# Altium PCB DEV_BOARD.PcbDoc
Units mm, origin at the board's own origin, x right, y up, seen from the top; angles counter-clockwise.
Board outline 50 x 25 mm, 2 copper layers (Top Layer, Bottom Layer); 28 components, 28 nets, 151 pads, 19 vias.
Unrouted connection lines stored in the file: 16.
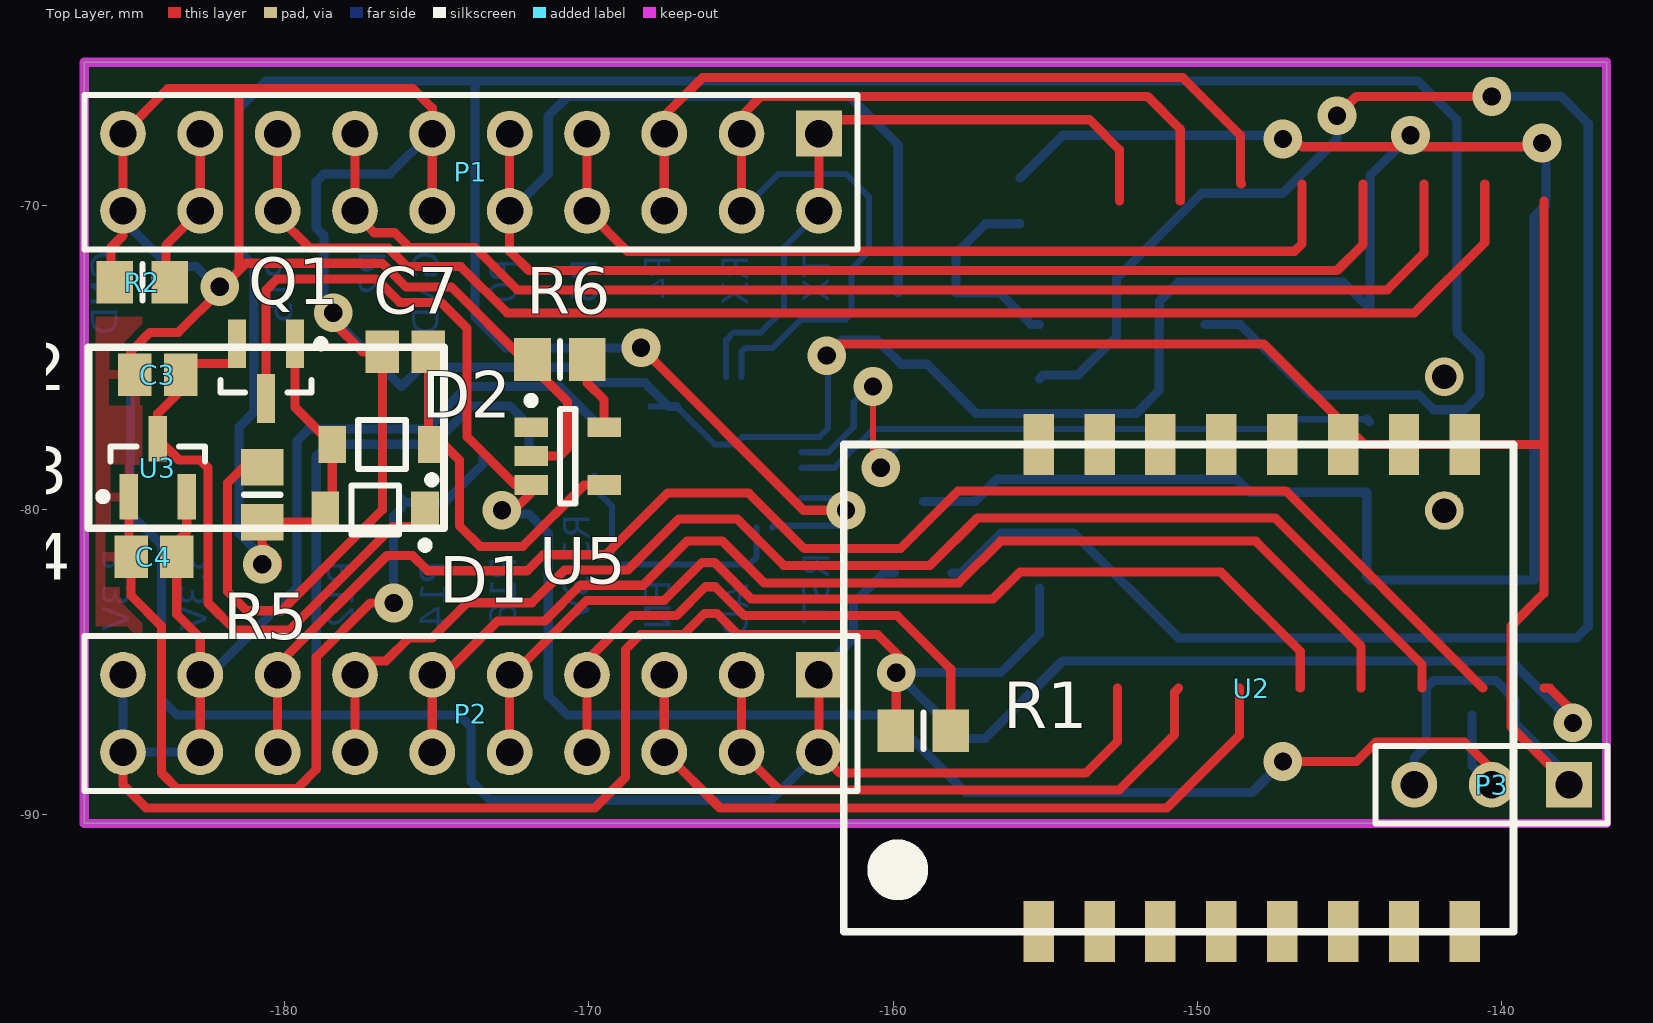
[diagram p0: Top Layer view]
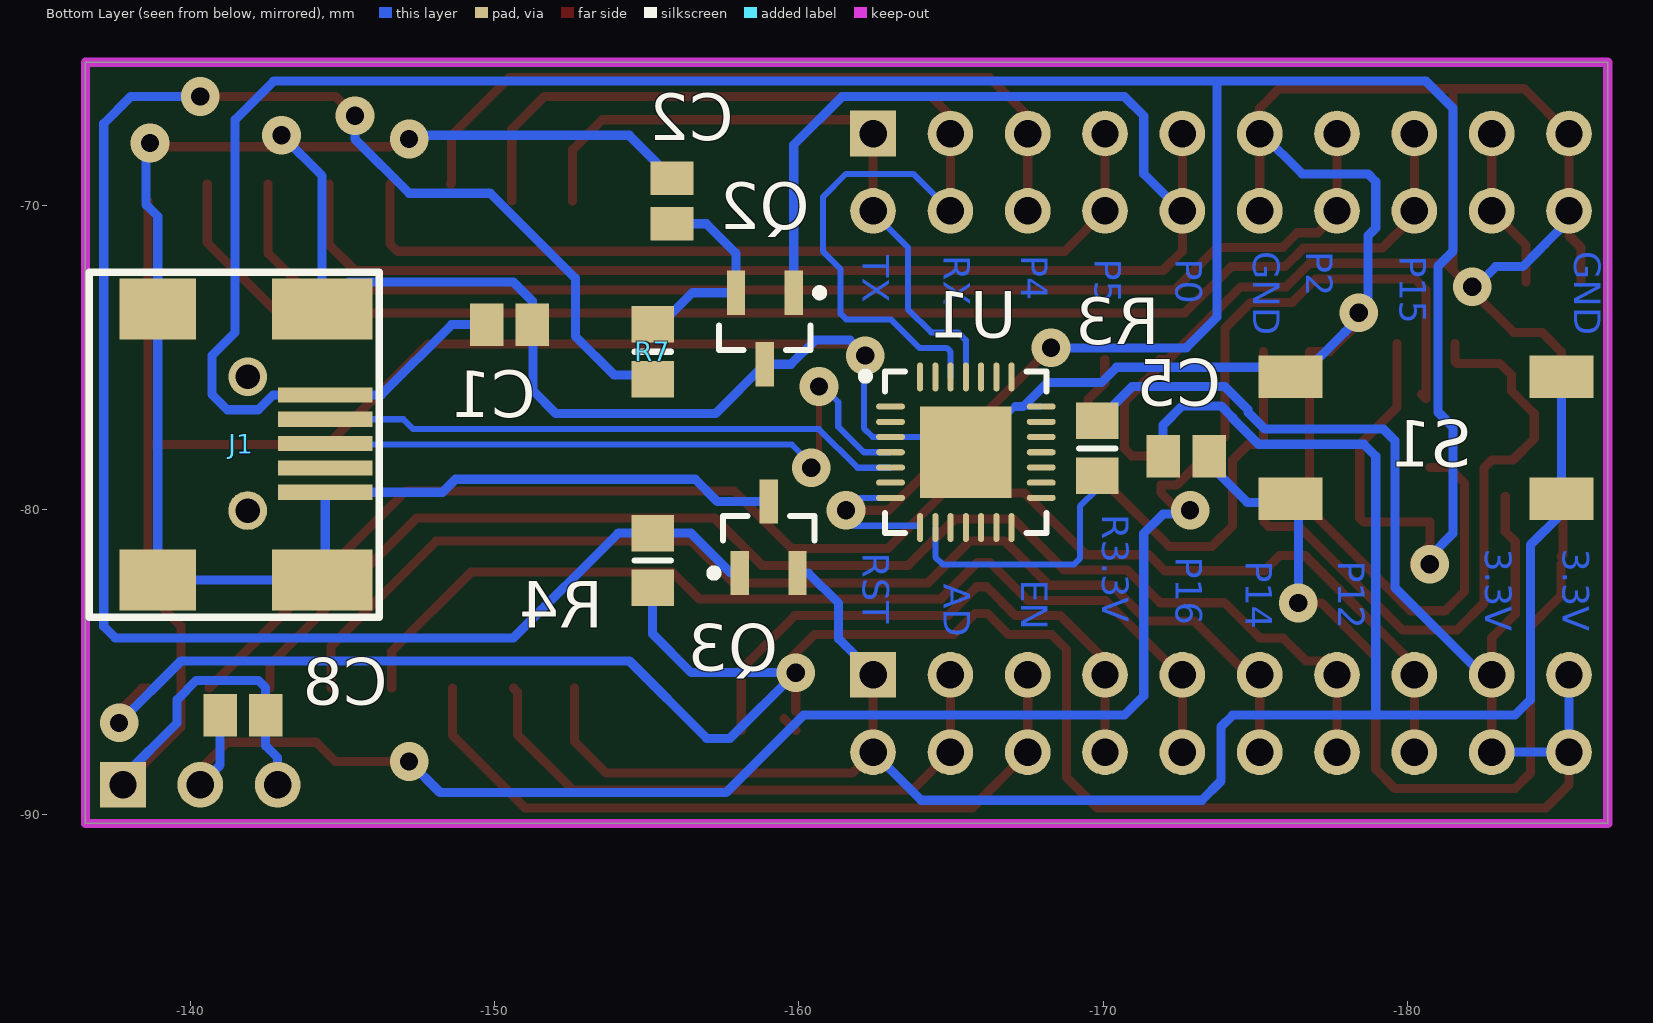
[diagram p1: Bottom Layer view, seen from below]

## Layer stack, top to bottom
Top Solder: solder mask 0.0102, Solder Resist, Dk 3.5
Top Layer: signal copper 0.0356
Dielectric 1: dielectric 0.32, FR-4, Dk 4.8
Bottom Layer: signal copper 0.0356
Bottom Solder: solder mask 0.0102, Solder Resist, Dk 3.5

## Board outline
-186.563,-90.297 -136.563,-90.297 -136.563,-65.297 -186.563,-65.297

## Design rules (kind name [scope] priority, off if disabled: settings)
Clearance [All] p1: gap=0.2
FabricationTestPointUsage [All] p1 off: valid=0 allowmultiple=FALSE
FabricationTestpoint [All] p1 off: side=3 testpointundercomponent=TRUE minsize=1.016 maxsize=2.54 preferedsize=1.524 minholesize=0 maxholesize=1.016 preferedholesize=0.813 testpointgrid=0.025 allowsidetop=TRUE allowsidebottom=TRUE usegrid=TRUE gridtolerance=0
FanoutControl Fanout_BGA [IsBGA] p1 off: bgadir=Out bgaviamode=Centered fanoutstyle=Auto fanoutdirection=Alternating viagrid=0.025 // Fanout_BGA (Default Rule)
FanoutControl Fanout_LCC [IsLCC] p2 off: bgadir=Out bgaviamode=Centered fanoutstyle=Auto fanoutdirection=Alternating viagrid=0.025 // Fanout_LCC (Default Rule)
FanoutControl Fanout_SOIC [IsSOIC] p3 off: bgadir=Out bgaviamode=Centered fanoutstyle=Auto fanoutdirection=Alternating viagrid=0.025 // Fanout_SOIC (Default Rule)
FanoutControl Fanout_Small [(CompPinCount < 5)] p4 off: bgadir=Out bgaviamode=Centered fanoutstyle=Auto fanoutdirection=OutThenIn viagrid=0.025 // Fanout_Small (Default Rule)
FanoutControl Fanout_Default [All] p5 off: bgadir=Out bgaviamode=Centered fanoutstyle=Auto fanoutdirection=Alternating viagrid=0.025 // Fanout_Default (Default Rule)
PlaneConnect [All] p1: planeconnectstyle=Relief reliefexpansion=0.508 reliefentries=4 reliefconductorwidth=0.3 reliefairgap=0.3
PolygonConnect [All] p1: connectstyle=Relief reliefconductorwidth=0.3 reliefentries=4 polygonreliefangle="90 Angle" airgapwidth=0.3
RoutingCorners [All] p1 off: cornerstyle=45-Degree minsetback=2.54 maxsetback=2.54
RoutingLayers [All] p1 off: top layer_v5=TRUE bottom layer_v5=TRUE
RoutingPriority [All] p1 off: routingpriority=0
RoutingTopology [All] p1 off: topology=Shortest
RoutingVias [All] p1 off: holewidth=0.635 width=1.3 viastyle="Through Hole" minholewidth=0.711 minwidth=1.27 maxholewidth=0.711 maxwidth=1.27
SilkToBoardRegionClearance [All] p1 off:
SilkToSilkClearance [All] p1 off: silktosilkclearance=0.254
SilkToSolderMaskClearance [IsPad] p1 off: minsilkscreentomaskgap=0.254 clearancetoexposedcopper=TRUE
SolderMaskExpansion [All] p1: expansion=0.102
Width [All] p1: maxlimit=0.3 minlimit=0.2 preferedwidth=0.3
14 further rules are at their usual default settings.

## Components (designator, comment, footprint, x,y, rotation, side; value= is the part's Value field where it differs from the comment)
C1 "1uF" C0805 -150.495,-73.914 r0 bottom
C2 "1uF" C0805 -155.829,-69.85 r270 bottom
C3 "1uF" C0805 -184.15,-75.565 r0 top
C4 "1uF" C0805 -184.277,-81.534 r0 top
C5 "1uF" C0805 -172.72,-78.232 r0 bottom
C7 "1uF" C0805 -176.022,-74.803 r0 top
C8 "1uF" C0805 -141.732,-86.741 r0 bottom
D1 "MBR0520LT1G" ONSC-SOD-123-2-425-04_V -177.009,-80 r180 top
D2 "MBR0520LT1G" ONSC-SOD-123-2-425-04_V -176.784,-77.851 r180 top
J1 "Mini usb_B" ?#1 -138.938,-82.296 r180 bottom
P1 "Header 10X2" HDR2X10 -162.433,-67.637 r180 top locked
P2 "Header 10X2" HDR2X10 -162.433,-85.417 r180 top locked
P3 "Header 3" HDR1X3 -137.795,-89.027 r180 top
Q1 "IRLML6402" SOT95P237X112-3N -180.594,-75.438 r270 top
Q2 "BSS138" MICRO3_M -158.877,-74.041 r270 bottom
Q3 "BSS138" MICRO3_M -159.004,-80.899 r90 bottom
R1 "Res2" 6-0805_N -159.004,-87.249 r180 top
R2 "Res2" 6-0805_N -184.658,-72.517 r180 top
R3 "Res2" 6-0805_N -169.799,-77.978 r270 bottom
R4 "Res2" 6-0805_N -155.194,-81.661 r270 bottom
R5 "10K" 6-0805_N -180.721,-79.502 r270 top
R6 "3K" 6-0805_N -170.942,-75.057 r0 top
R7 "Res2" 6-0805_N -155.194,-74.803 r270 bottom
S1 "STMW" ?#2 -176.149,-79.629 r0 bottom
U1 "CP2102-GM" SLAB-QFN-28-3125X3125TP_M -165.481,-78.105 r180 bottom
U2 "ESP07" ESP07 -150.622,-85.852 r90 top locked
U3 "MCP1700T-3302E/TT" SOT-23-TT3_N -184.15,-78.613 r90 top
U5 "MCP73831T-2ATI/OT" SOT-23-OT5_N -170.688,-78.232 r0 top

## Footprints (in the part's own frame and the unit in brackets; to place one, negate y for a bottom-side part, rotate by r counter-clockwise, add the part's x,y. Pads: shape width x height; smd on the part's side, far side on the other; paste and mask are expansions set on the pad)
6-0805_N [mm] "Chip Resistor, Body 2.0x1.2mm, IPC Medium Density"
  rect 1.2x1.4 smd: 1(-0.9,0) 2(0.9,0)
  silkscreen extent 0,-0.6 0,0.6, body extent -1.07,-0.7 1.07,0.7, height 0.7
C0805 [mm]
  rect 1.1x1.4 smd: 1(-0.75,0) 2(0.75,0)
  body extent -1.1,-0.72 1.1,0.72, height 1.4
ESP07 [mm]
  rect 2x1 smd: 1(-8,4.594) 2(-8,2.594) 3(-8,0.594) 4(-8,-1.406) 5(-8,-3.406) 6(-8,-5.406) 7(-8,-7.406) 8(-8,-9.406) 9(8,4.594) 10(8,2.594) 11(8,0.594) 12(8,-1.406) 13(8,-3.406) 14(8,-5.406) 15(8,-7.406) 16(8,-9.406)
  silkscreen extent -8,-11 8,11
HDR1X3 [mm] "Connector; Header; 3 Position"
  rect 1.5x1.5 hole 0.9: 1(0,0)
  round 1.5 hole 0.9: 2(2.54,0) 3(5.08,0)
  silkscreen extent -1.27,-1.27 6.35,1.27
HDR2X10 [mm] "Connector; Header; 10x2 Position"
  rect 1.5x1.5 hole 0.9: 1(0,0)
  round 1.5 hole 0.9: 2(0,2.54) 3(2.54,0) 4(2.54,2.54) 5(5.08,0) 6(5.08,2.54) 7(7.62,0) 8(7.62,2.54) 9(10.16,0) 10(10.16,2.54) 11(12.7,0) 12(12.7,2.54) 13(15.24,0) 14(15.24,2.54) 15(17.78,0) 16(17.78,2.54) 17(20.32,0) 18(20.32,2.54) 19(22.86,0) 20(22.86,2.54)
  silkscreen extent -1.27,-1.27 24.13,3.81
MICRO3_M [mm] "SOT23, 3-Leads, Body 2.9x1.3mm, Pitch 0.95mm, Lead Span 2.3mm, IPC Low Density"
  rect 1.45x0.6 smd: 1(-1.175,0.95) 2(-1.175,-0.95) 3(1.175,0)
  silkscreen extent -1.3,-1.5 0.7,1.92, body extent -0.7,-1.5 0.7,1.5, height 1.12
ONSC-SOD-123-2-425-04_V [mm] "SOD, 2-Leads, Body 2.69x1.6mm"
  rect 0.91x1.22 smd: 1(-1.635,0) 2(1.635,0)
  silkscreen extent -1.76,-0.8 0.78,1.28, body extent -1.35,-0.8 1.35,0.8, height 1.35
SLAB-QFN-28-3125X3125TP_M [mm] "QFN, 28-Leads, Body 5x5mm, Pitch 0.5mm, Thermal Pad 3.13x3.13mm, IPC Low Density"
  oval 0.95x0.2 smd: 1(-2.475,1.5) 2(-2.475,1) 3(-2.475,0.5) 4(-2.475,0) 5(-2.475,-0.5) 6(-2.475,-1) 7(-2.475,-1.5) 15(2.475,-1.5) 16(2.475,-1) 17(2.475,-0.5) 18(2.475,0) 19(2.475,0.5) 20(2.475,1) 21(2.475,1.5)
  oval 0.2x0.95 smd: 8(-1.5,-2.475) 9(-1,-2.475) 10(-0.5,-2.475) 11(0,-2.475) 12(0.5,-2.475) 13(1,-2.475) 14(1.5,-2.475) 22(1.5,2.475) 23(1,2.475) 24(0.5,2.475) 25(0,2.475) 26(-0.5,2.475) 27(-1,2.475) 28(-1.5,2.475)
  rect 3x3 smd: 29(0,0)
  silkscreen extent -3.42,-2.65 2.65,2.65, body extent -2.5,-2.5 2.5,2.5, height 1
SOT95P237X112-3N [mm] "SOT23, 3-Leads, Body 2.92x2.37mm, Pitch 0.95mm, IPC Medium Density"
  rect 1.6x0.6 smd: 1(-0.9,0.95) 2(0.9,0) 3(-0.9,-0.95)
  silkscreen extent -1.02,-1.5 0.7,1.93, body extent -0.7,-1.52 0.7,1.52, height 1.12
SOT-23-OT5_N [mm] "SOT23, 5-Leads, Body 2.9x1.6mm, Pitch 0.95mm, Lead Span 2.7mm, IPC Medium Density"
  rect 1.1x0.65 smd: 1(-1.2,0.95) 2(-1.2,0) 3(-1.2,-0.95) 4(1.2,-0.95) 5(1.2,0.95)
  silkscreen extent -1.32,-1.55 0.25,1.95, body extent -0.9,-1.55 0.9,1.55, height 1.45
SOT-23-TT3_N [mm] "SOT23, 3-Leads, Body 2.9x1.3mm, Pitch 0.95mm, Lead Span 2.4mm, IPC Medium Density"
  rect 1.5x0.6 smd: 1(-0.95,0.95) 2(-0.95,-0.95) 3(0.95,0)
  silkscreen extent -1.07,-1.55 0.7,1.92, body extent -0.7,-1.52 0.7,1.53, height 1.12
?#1 [mm]
  rect 3.1x0.5 smd: 1(5.5,6.075) 2(5.5,5.275) 3(5.5,4.475) 4(5.5,3.675) 5(5.5,2.875)
  round 1.27 hole 0.8: 2(2.95,2.275)
  rect 2.5x2 smd: GND(0,0) GND(0,8.9)
  rect 3.3x2 smd: GND(5.4,0) GND(5.4,8.9)
  silkscreen extent -2.25,-1.22 7.27,10.1
?#2 [mm]
  rect 2.1x1.4 smd: 1(0,0) 2(-8.9,0) 3(0,-4) 4(-8.9,-4)

## Part data
C1 C2 C3 C4 C5 C7 C8: library part Cap, "Capacitor"
D1 D2: "Schottky Power Rectifier, 2-Pin SOD-123, Pb-Free, Tape and Reel"
P1 P2: "Header, 10-Pin, Dual row"
P3: "Header, 3-Pin"
Q2 Q3: "N-Channel MOSFET"
R1 R2 R3 R4 R7: "Resistor"
R5 R6: library part Res2, "Resistor"
S1: "Switch"
U1: "Single-Chip USB to UART Bridge, 1024 Bytes EEPROM, -40 to 85 degC, 28-pin QFN, Tube"
U2: "ESP8266"
U3: "Low Quiescent Current LDO, 3-Pin SOT-23, Extended Temperature, Tape and Reel"
U5: "Miniature Single-Cell, Fully Integrated Li-Ion, Li-Polymer Charge Management Controller, 4.2V, 5-Pin SOT-23, Industrial Temperature, Tape and Reel"

## Via types
v1: diameter 1.27, hole 0.6, Top Layer to Bottom Layer, 18 vias
v2: diameter 1.27, hole 0.8, Top Layer to Bottom Layer, 1 vias

## Nets (pads, with @x,y where several pads share a name; then routed paths per layer and width w, separated by ;. In a path a pad name is that pad's centre, name@x,y a point inside that pad or via, vN(x,y) a via of type N, cw(c..) or ccw(c..) an arc to the next point about the centre after c; other vN are vias at no path point)
3.3V: C4.2 P2.17 P2.18 P2.19 P2.20 R1.2 R3.1 R4.2 U2.8 U3.2 | length 103.3
  Top Layer w0.3: P2.20 -185.293,-89.027 -184.531,-89.789 -169.799,-89.789 -168.783,-88.773 -168.783,-84.582 -168.298,-84.097 -166.888,-84.097 -166.188,-83.397 -165.788,-83.397 -165.088,-84.097 -160.505,-84.097 v1@-159.703,-84.9 ; U3.2 -183.2,-80.711 -183.527,-81.038 C4.2 -183.527,-83.427 -182.753,-84.201 P2.17 P2.18 P2.18@-182.753,-88.392 ; R1.2 R1.2@-159.512,-86.857 ; R1.2@-159.893,-86.614 v1@-159.893,-85.101 ; -138.622,-85.852 -138.43,-85.852 -137.287,-86.995 v1(-137.668,-86.995)
  Bottom Layer w0.3: P2.19 P2.20 P2.18 ; P2.17 -182.445,-85.417 -179.578,-82.55 -179.578,-77.724 -179.197,-77.343 -175.301,-77.343 -174.749,-76.791 -174.749,-76.705 -173.99,-75.946 -170.942,-75.946 -169.81,-77.078 R3.1 ; R4.2 -155.194,-84.074 -156.464,-85.344 v1(-159.893,-85.344) -157.734,-87.503 -156.972,-87.503 -154.432,-84.963 -139.7,-84.963 v1(-137.668,-86.995)
ADC: P2.3 P2.4 U2.2 | length 19.6
  Top Layer w0.3: P2.3 P2.4 -163.733,-89.197 -152.57,-89.197 -150.749,-87.376 -150.749,-85.979 -150.622,-85.852
ENABLE: P2.5 P2.6 U2.3 | length 24.7
  Top Layer w0.3: P2.5 P2.6 -165.681,-89.789 -151.003,-89.789 -148.622,-87.408 -148.622,-85.852
GND: C1.1 C2.1 C3.1 C4.1 C5.1 C7.1 C8.1 J1.5 J1.GND P1.11 P1.12 P1.19 P1.20 P3.1 P3.3 Q2.3 Q3.3 R2.2 R5.1 R6.1 S1.1 S1.3 U1.3 U1.21 U1.29 U2.16 U3.1 U5.2 | length 271.2
  Top Layer w0.3: R2.2@-185.685,-72.517 -185.685,-71.379 -185.293,-70.987 P1.20 P1.19 -183.823,-66.167 -181.483,-66.167 ; U3.1 -185.1,-81.461 C4.1 ; C4.1@-185.027,-81.779 -185.027,-82.816 -184.027,-83.816 -184.027,-88.642 -183.515,-89.154 -179.578,-89.154 -178.943,-88.519 -178.943,-84.836 -177.165,-83.058 -176.784,-83.058 v1@-176.403,-82.677 ; C3.1 -185.039,-75.426 -185.039,-74.803 -184.404,-74.168 -183.473,-74.168 -182.118,-72.813 -182.118,-72.771 -181.244,-71.897 -176.781,-71.897 -175.995,-72.683 -174.499,-72.683 -172.125,-75.057 R6.1 -171.842,-75.3 -170.688,-76.454 -170.688,-77.978 -170.942,-78.232 U5.2 ; -181.483,-72.136 -181.483,-66.167 ; R5.1 -181.345,-78.602 -181.864,-79.121 -181.864,-82.677 -181.229,-83.312 -180.086,-83.312 -176.772,-79.998 C7.1 -177.419,-74.803 -178.413,-73.809 v1@-178.413,-73.397 ; P1.12 P1.11 -175.133,-66.802 -175.768,-66.167 -181.483,-66.167 ; v1(-162.179,-74.93) -161.798,-74.549 -147.828,-74.549 -144.526,-77.851 -138.622,-77.851 ; v1@-147.193,-67.564 -147.066,-67.564 -146.558,-68.072 v1@-138.303,-68.072 ; -138.622,-69.852 -138.622,-77.851 ; P3.1 -139.7,-87.122 -139.7,-83.82 -138.622,-82.742 -138.622,-77.851
  Bottom Layer w0.2: U1.21 -167.362,-76.605 ; -167.108,-76.605 -165.862,-77.851 -165.193,-77.851 U1.29@-164.947,-77.605 ; U1.29@-164.981,-77.605 U1.3 -162.424,-77.605 -162.131,-77.312 -162.131,-74.978 v1(-162.179,-74.93)
  Bottom Layer w0.3: P1.20 -185.293,-70.485 -184.5,-71.278 -184.495,-71.278 -184.29,-71.483 -184.29,-71.488 -183.769,-72.009 -182.88,-72.009 v1@-182.118,-72.771 ; v1(-176.403,-83.058) -176.403,-80.2 S1.1@-176.149,-79.946 ; S1.1 -176.028,-79.75 -174.725,-79.75 -173.47,-78.495 C5.1 ; P1.11 -175.206,-67.637 -176.53,-68.961 -178.689,-68.961 -178.943,-69.215 -178.943,-70.739 -178.689,-70.993 -178.689,-73.396 -177.927,-74.158 -177.927,-74.168 -176.149,-75.946 -175.514,-75.311 -170.434,-75.311 -169.926,-75.819 -168.148,-75.819 -167.362,-76.605 -167.108,-76.605 ; v1(-162.179,-74.93) -161.671,-74.422 -160.528,-74.422 -159.734,-75.216 Q2.3 -157.258,-76.835 -152.019,-76.835 -151.257,-76.073 -151.257,-73.926 C1.1 -151.245,-73.14 -150.622,-72.517 -145.217,-72.517 -144.338,-73.396 -144.338,-69.027 v1(-143.002,-67.691) ; Q3.3 -157.321,-79.724 -156.591,-78.994 -148.717,-78.994 -148.29,-79.421 J1.5 -144.438,-82.196 -144.338,-82.296 -138.938,-82.296 -138.938,-73.396 -138.938,-70.358 -138.557,-69.977 -138.557,-68.072 v1(-138.684,-67.945) ; C2.1 -154.432,-67.703 -154.432,-67.691 -147.32,-67.691 v1(-147.193,-67.818) ; P3.3 -142.875,-88.138 -142.482,-87.745 C8.1 -142.482,-85.84 -142.24,-85.598 -140.208,-85.598 -139.573,-86.233 -139.573,-86.995 -137.795,-88.773 P3.1
  other v1: -178.388,-73.522 -182.113,-72.672
GPIO0: P1.9 P1.10 Q2.1 U2.13 | length 55.7
  Top Layer w0.3: P1.9 P1.10 -172.593,-71.501 -171.958,-72.136 -145.415,-72.136 -144.563,-71.284 -144.563,-69.297
  Bottom Layer w0.3: P1.10@-172.593,-70.476 P1.10 -172.539,-70.177 -171.323,-68.961 -171.323,-67.056 -170.688,-66.421 -161.417,-66.421 -159.827,-68.011 Q2.1
GPIO2: P1.13 P1.14 U2.14 | length 41.5
  Top Layer w0.3: P1.13 P1.14 -177.673,-70.262 -177.038,-70.897 -176.367,-70.897 -175.89,-71.374 -173.736,-71.374 -172.339,-72.771 -143.764,-72.771 -142.563,-71.57 -142.563,-69.297
GPIO4: P1.5 P1.6 U2.11 | length 25
  Top Layer w0.3: P1.6 P1.5 -167.513,-67.056 -166.257,-65.8 -150.481,-65.8 -148.59,-67.691 -148.59,-69.27 -148.563,-69.297
GPIO5: P1.7 P1.8 U2.12 | length 28.6
  Top Layer w0.3: P1.7 P1.8 -168.729,-71.501 -146.812,-71.501 -146.563,-71.252 -146.563,-69.297
GPIO12: P2.13 P2.14 U2.6 | length 43.8
  Top Layer w0.3: P2.14 P2.13 -177.219,-84.963 -176.657,-84.963 -175.895,-84.201 -175.133,-84.201 -173.979,-83.047 -171.863,-83.047 -170.788,-81.972 -168.713,-81.972 -167.038,-80.297 -165.113,-80.297 -163.588,-81.822 -158.784,-81.822 -157.226,-80.264 -147.447,-80.264 -142.622,-85.089 -142.622,-85.852
GPIO13: P2.15 P2.16 U2.7 | length 49.4
  Top Layer w0.3: P2.16 P2.15 -180.213,-85.09 -176.62,-81.497 -175.788,-81.497 -175.288,-81.997 -172.013,-81.997 -171.488,-81.472 -169.438,-81.472 -167.413,-79.447 -164.738,-79.447 -162.913,-81.272 -159.758,-81.272 -157.861,-79.375 -147.099,-79.375 -140.622,-85.852
GPIO14: P2.11 P2.12 U2.5 | length 39
  Top Layer w0.3: P2.12 P2.11 -174.946,-85.605 -172.988,-83.647 -171.445,-83.647 -170.27,-82.472 -168.213,-82.472 -166.763,-81.022 -165.613,-81.022 -164.238,-82.397 -157.835,-82.397 -156.464,-81.026 -148.082,-81.026 -144.622,-84.486 -144.622,-85.852
GPIO15: P1.15 P1.16 U2.15 | length 46.6
  Top Layer w0.3: P1.15 P1.16 -180.213,-70.347 -179.163,-71.397 -176.574,-71.397 -175.962,-72.009 -174.194,-72.009 -172.674,-73.528 -142.87,-73.528 -140.563,-71.221 -140.563,-69.297
GPIO16: P2.9 P2.10 U2.4 | length 33.2
  Top Layer w0.3: P2.10 P2.9 -172.508,-85.417 -170.063,-82.972 -167.513,-82.972 -166.263,-81.722 -165.863,-81.722 -164.663,-82.922 -156.714,-82.922 -155.834,-82.042 -149.225,-82.042 -146.622,-84.645 -146.622,-85.852
NetC2_2: C2.2 Q2.2 R7.1 | length 7
  Bottom Layer w0.3: C2.2 -156.96,-70.6 -157.927,-71.567 Q2.2 -156.496,-72.866 -155.459,-73.903 R7.1
NetC3_2: C3.2 D1.1 Q1.3 U3.3 | length 20.6
  Top Layer w0.3: Q1.3 -181.544,-75.118 -181.61,-75.184 -183.019,-75.184 C3.2 -183.4,-76.085 -184.15,-76.835 U3.3 -183.454,-78.359 -182.753,-78.359 -182.499,-78.613 -182.499,-83.058 -181.61,-83.947 -179.832,-83.947 -176.432,-80.547 -175.432,-80.547 D1.1@-175.276,-80.391
NetC7_2: C7.2 D2.1 U5.4 | length 12.2
  Top Layer w0.3: D2.1@-175.26,-77.851 C7.2@-175.26,-74.803 ; D2.1 -174.752,-77.851 -174.244,-78.359 -174.244,-80.518 -173.565,-81.197 -172.163,-81.197 -170.148,-79.182 U5.4
NetC8_2: C8.2 P3.2 Q1.2 U5.3 | length 62
  Top Layer w0.3: Q1.2@-180.456,-76.2 Q1.2 -180.594,-72.778 -180.228,-72.412 -176.973,-72.412 -176.202,-73.183 -174.848,-73.183 -173.99,-74.041 -173.99,-77.597 -172.405,-79.182 U5.3 -171.888,-79.432 v1@-172.593,-80.137 ; v1(-147.193,-88.265) -144.78,-88.265 -144.145,-87.63 -141.224,-87.63 -140.335,-88.519 P3.2
  Bottom Layer w0.3: v1@-172.593,-80.137 -171.958,-80.137 -171.323,-80.772 -171.323,-86.106 -170.688,-86.741 -160.147,-86.741 -157.607,-89.281 -148.209,-89.281 v1(-147.193,-88.265) ; C8.2 -140.982,-88.38 P3.2
  other v1: -172.847,-80.01
NetJ1_2: J1.2 U1.5 | length 19.5
  Bottom Layer w0.2: U1.5 -162.998,-78.613 -161.925,-78.613 -160.655,-77.343 -147.329,-77.343 -147.007,-77.021 J1.2@-144.438,-77.021
  Bottom Layer w0.3: J1.2@-144.438,-77.021 J1.2@-144.347,-77.112 ; J1.2@-142.004,-80.137 J1.2@-141.888,-80.021
NetJ1_3: J1.3 U1.4 | length 22.8
  Top Layer w0.2: v1@-160.655,-76.2 -160.655,-78.359 v1(-160.401,-78.613)
  Top Layer w0.3: v1@-160.909,-76.2 v1(-160.655,-75.946)
  Bottom Layer w0.2: U1.4 -162.129,-78.105 -161.29,-77.266 -161.29,-76.454 v1@-160.719,-75.883 ; v1@-160.401,-78.486 -159.766,-77.851 -144.468,-77.851 J1.3
NetP1_17: P1.17 P1.18 R2.1 | length 5.3
  Top Layer w0.3: R2.1@-183.885,-72.517 -183.885,-71.309 P1.18 P1.17
NetP2_7: P2.7 P2.8 R1.1 | length 19.1
  Top Layer w0.3: P2.8 P2.7 -170.053,-84.937 -168.588,-83.472 -167.113,-83.472 -166.163,-82.522 -165.838,-82.522 -164.888,-83.472 -159.86,-83.472 -158.104,-85.228 R1.1
NetQ3_1: Q3.1 R4.1 R7.2 | length 63.3
  Top Layer w0.3: v1(-145.415,-67.056) -144.78,-66.421 v1(-140.335,-66.421)
  Bottom Layer w0.3: Q3.1 -157.766,-82.074 -156.453,-80.761 R4.1 -154.062,-80.761 -150.622,-84.201 -137.541,-84.201 -137.163,-83.823 -137.163,-67.31 -138.052,-66.421 v1(-140.335,-66.421) ; R7.2 -155.056,-75.565 -153.924,-75.565 -152.654,-74.295 -152.654,-72.39 -149.86,-69.596 -147.193,-69.596 -145.415,-67.818 v1(-145.415,-67.056)
NetR3_2: R3.2 U1.9 | length 8.9
  Bottom Layer w0.2: R3.2 -169.799,-79.314 -169.227,-79.886 -169.227,-81.598 -169.037,-81.788 -164.719,-81.788 -164.481,-81.55 U1.9
NetR6_2: R6.2 U5.5 | length 2.5
  Top Layer w0.3: R6.2 -170.042,-75.83 -169.488,-76.384 U5.5
RESET: C5.2 P2.1 P2.2 Q3.2 S1.2 S1.4 U2.1 | length 72.2
  Top Layer w0.3: P2.1 P2.2 -161.744,-88.646 -153.67,-88.646 -152.622,-87.598 -152.622,-85.852
  Bottom Layer w0.3: S1.4@-185.049,-75.946 -185.049,-79.946 -185.049,-80.127 -184.023,-81.153 -184.023,-86.233 -183.515,-86.741 -178.943,-86.741 ; C5.2 -171.958,-78.22 -171.958,-77.216 -172.593,-76.581 -173.863,-76.581 -174.249,-76.967 -174.249,-76.998 -175.094,-77.843 -178.554,-77.843 -178.943,-78.232 -178.943,-86.741 ; P2.2 -164.011,-89.535 -173.233,-89.535 -173.863,-88.905 -173.863,-87.122 -174.244,-86.741 -178.943,-86.741 ; P2.1 -162.433,-85.369 -161.3,-84.236 -161.3,-83.068 -160.306,-82.074 Q3.2
RXD: P1.3 P1.4 U1.26 U2.10 | length 34.7
  Top Layer w0.3: P1.4 P1.3 -164.973,-67.056 -164.338,-66.421 -151.638,-66.421 -150.564,-67.496 -150.564,-69.852
  Bottom Layer w0.2: U1.26 -164.981,-74.811 -164.846,-74.676 -163.957,-74.676 -163.02,-73.739 -161.545,-73.739 -161.368,-73.562 -161.368,-72.087 -160.782,-71.501 -160.782,-69.723 -161.544,-68.961 -163.757,-68.961 P1.4
  Bottom Layer w0.3: P1.4 P1.4@-164.919,-70.177
TXD: P1.1 P1.2 U1.25 U2.9 | length 21.9
  Top Layer w0.3: P1.2 P1.1 -161.979,-67.183 -153.543,-67.183 -152.563,-68.163 -152.563,-69.852
  Bottom Layer w0.2: U1.25 -165.481,-74.422 -165.227,-74.168 -164.338,-74.168 -163.576,-73.406 -163.576,-71.374 -162.433,-70.231 P1.2
VCC_USB: C1.2 D1.2 D2.2 J1.1 Q1.1 R5.2 U1.7 U1.8 | length 113.6
  Top Layer w0.3: v1@-180.213,-81.915 -180.213,-81.661 -180.721,-81.153 R5.2 -178.557,-80.402 -178.419,-80.264 D2.2 -179.644,-76.626 Q1.1 ; v1(-168.275,-74.676) -162.941,-80.01 v1(-161.544,-80.01)
  Bottom Layer w0.2: U1.8 -163.919,-80.518 -161.798,-80.518 -161.798,-79.605 U1.7
  Bottom Layer w0.3: v1(-180.721,-81.788) -180.721,-81.534 -181.483,-80.772 -181.483,-77.28 -180.988,-76.785 -180.988,-71.996 -181.483,-71.501 -181.483,-66.802 -180.594,-65.913 -173.736,-65.913 ; v1(-168.275,-74.676) -172.72,-74.676 -173.736,-73.66 -173.736,-65.913 ; C1.2 -148.59,-73.914 -146.283,-76.221 J1.1 -142.727,-76.221 -142.24,-76.708 -141.224,-76.708 -140.716,-76.2 -140.716,-74.93 -141.478,-74.168 -141.478,-67.183 -142.748,-65.913 -173.736,-65.913
pads on no net: J1.4 U1.1 U1.2 U1.6 U1.10 U1.11 U1.12 U1.13 U1.14 U1.15 U1.16 U1.17 U1.18 U1.19 U1.20 U1.22 U1.23 U1.24 U1.27 U1.28 U5.1
copper on no net:
  other v2: -141.888,-75.621

## Polygon pours and split planes (outlines as drawn)
GND on Top Layer "Bottom Layer-No Net" (solid, pour order 29): -186.436,-73.66 -184.658,-73.66 -184.658,-84.074 -184.785,-84.201 -185.166,-83.82 -186.436,-83.82

## Keep-outs
Keep-Out Layer:
  the board outline again, w0.3

## Other copper
Bottom Layer:
  text "GND" at -185.166,-71.501 h1.5 r90
  text "P2" at -176.363,-71.497 h1.5 r90
  text "GND" at -174.625,-71.501 h1.5 r90
  text "P4" at -167.005,-71.628 h1.5 r90
  text "RX" at -164.465,-71.628 h1.5 r90
  text "TX" at -161.798,-71.628 h1.5 r90
  text "P15" at -179.438,-71.647 h1.5 r90
  text "P0" at -172.085,-71.755 h1.5 r90
  text "P5" at -169.418,-71.755 h1.5 r90
  text "R3.3V" at -169.672,-80.137 h1.5 r90
  text "3.3V" at -184.785,-81.28 h1.5 r90
  text "3.3V" at -182.245,-81.28 h1.5 r90
  text "RST" at -161.798,-81.407 h1.5 r90
  text "P16" at -172.085,-81.534 h1.5 r90
  text "P12" at -177.419,-81.661 h1.5 r90
  text "P14" at -174.371,-81.661 h1.5 r90
  text "EN" at -167.005,-82.296 h1.5 r90
  text "AD" at -164.465,-82.423 h1.5 r90